# Altium PCB PCB1update.PcbDoc (part 2 of 2)
Units mil, origin at the board's own origin, x right, y up, seen from the top; angles counter-clockwise.
Board outline 3500 x 2300 mil, 2 copper layers (Top Layer, Bottom Layer); 42 components, 76 nets, 256 pads, 63 vias.
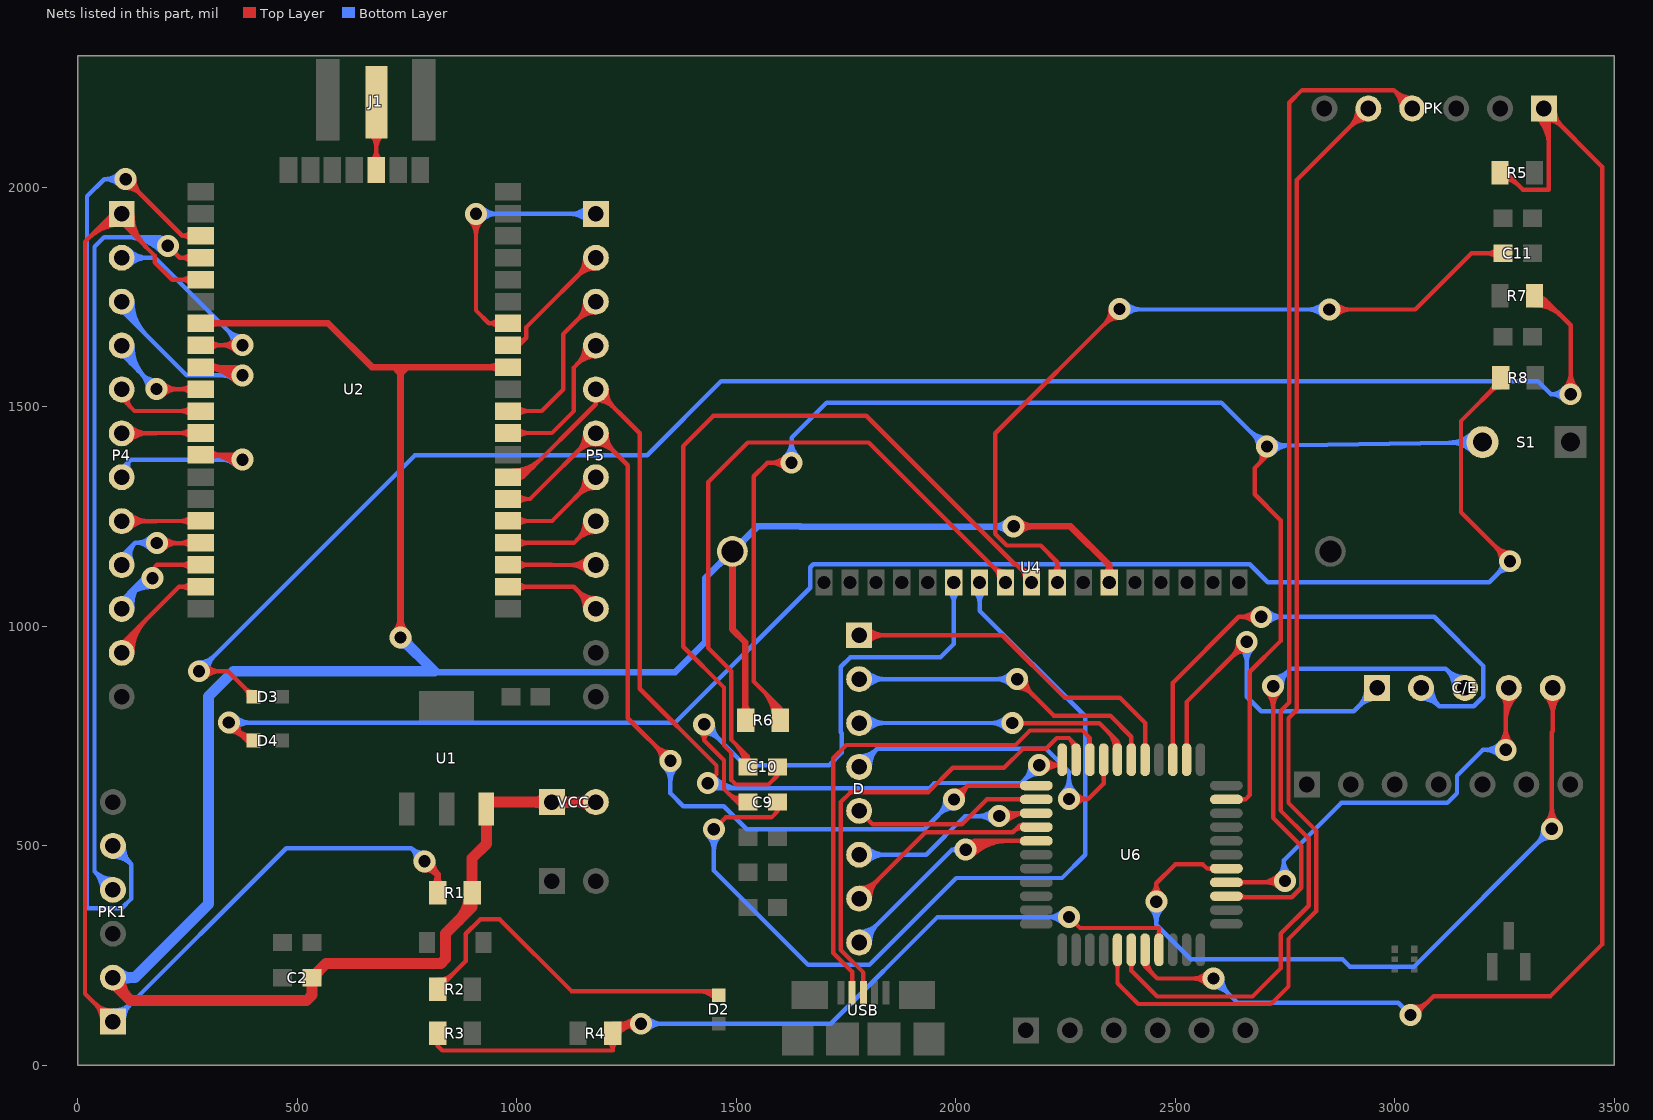
[diagram p2: the nets of this part, all layers, seen from the top]

## Via types
v1: diameter 50, hole 28, Top Layer to Bottom Layer, 63 vias

## Nets (pads, with @x,y where several pads share a name; then routed paths per layer and width w, separated by ;. In a path a pad name is that pad's centre, name@x,y a point inside that pad or via, vN(x,y) a via of type N, cw(c..) or ccw(c..) an arc to the next point about the centre after c; other vN are vias at no path point) (continued)
NetC9_1: C9.1 U4.6 | length 1508.3
  Top Layer w10: v1@1416.21,760.16 cw(c1403.58,740.44) 1427,740.44 ; v1(1427,777) 1427,740.44 ; v1@1437.79,760.16 ccw(c1450.42,740.44) 1427,740.44 ; 1483.28,618.72 ccw(c1504.5,639.93) C9.1@1517.97,613.12 ; 1493.07,608.93 ccw(c1511.05,626.9) C9.1@1522.46,604.19 ; 1502.86,599.14 ccw(c1517.6,613.87) C9.1@1526.95,595.25 ; C9.1@1511.14,594.05 ccw(c1502,590) 1502,600 ; C9.1@1511.14,605.95 cw(c1502,610) 1502,600 ; C9.1@1526.54,600 1502,600 ; 1427,740.44 1472,695.44 1472,630 1502,600
  Bottom Layer w10: v1@1427,757 cw(c1427,708.72) 1461.14,742.86 cw(c1495.28,777) v1@1447,777 ; v1(1427,777) 1520,684 1712,684 1740,712 1740,757 1738,759 1738,908 1760,930 1965.28,930 1995.28,960 U4.6@1995.28,1100 ; U4.6@1984.89,1079.3 cw(c1959.82,1054.23) 1995.28,1054.23 cw(c2030.73,1054.23) U4.6@2005.66,1079.3
NetC9_2: C9.2 U4.7 | length 2187.2
  Top Layer w10: v1(1449,538) 1476,565 1580,565 1593.46,578.46 ; C9.2@1588.1,586.33 cw(c1585.02,578.46) 1593.46,578.46 ; C9.2@1593.46,600 1593.46,578.46 ; C9.2@1598.83,586.33 ccw(c1601.91,578.46) 1593.46,578.46
  Bottom Layer w10: v1@1434.86,523.86 cw(c1400.72,489.72) 1449,489.72 cw(c1497.28,489.72) v1@1463.14,523.86 ; v1(1449,538) 1449,444 1664,229 1803,229 2001,427 2242,427 2295,480 2295,795.33 2054.33,1036 U4.7@2054.33,1100 ; U4.7@2043.95,1079.3 cw(c2018.88,1054.23) 2054.33,1054.23 cw(c2089.78,1054.23) U4.7@2064.71,1079.3
NetC10_1: C10.1 U4.9 | length 1998.9
  Top Layer w10: C10.1@1589.07,665.99 cw(c1587.19,660) 1593.46,660 ; C10.1@1593.46,680 1593.46,660 ; C10.1@1597.86,665.99 ccw(c1599.74,660) 1593.46,660 ; 2142.74,1137.3 ccw(c2172.44,1167) U4.9@2172.44,1125 ; 2149.29,1130.75 cw(c2128.85,1110.32) U4.9@2157.76,1110.32 ; U4.9@2172.44,1100 2172.44,1107.6 2138.04,1142 2134.26,1142 1796.26,1480 1448,1480 1379,1411 1379,954 1472,861 1472,729 1489,712 1489,650 1499,640 1573.46,640 1593.46,660
NetC10_2: C10.2 U4.8 | length 1717.7
  Top Layer w10: 1498.21,732.33 cw(c1445.88,680) C10.2@1519.88,680 ; 1515.28,715.26 cw(c1480.02,680) C10.2@1529.88,680 ; C10.2@1519.85,693.08 ccw(c1514.27,704) 1526.54,704 ; C10.2@1526.54,680 1526.54,704 ; C10.2@1533.22,693.08 cw(c1538.8,704) 1526.54,704 ; 2083.68,1137.3 ccw(c2113.39,1167.01) U4.8@2113.39,1125 ; 2090.24,1130.75 cw(c2069.8,1110.32) U4.8@2098.7,1110.32 ; U4.8@2113.39,1100 2113.39,1107.6 1801.99,1419 1526,1419 1436,1329 1436,951 1489,898 1489,741.54 1526.54,704
NetC11_2: C11.2 U4.10 | length 2207.4
  Top Layer w10: U4.10@2221.11,1120.7 ccw(c2196.04,1145.77) 2231.5,1145.77 ccw(c2266.95,1145.77) U4.10@2241.88,1120.7 ; U4.10@2231.5,1100 2231.5,1146.5 2193.53,1184.47 2116.34,1184.47 2090,1210.81 2090,1440 v1(2373,1723) ; v1@2353,1723 cw(c2304.72,1723) 2338.86,1688.86 cw(c2373,1654.72) v1@2373,1703 ; v1(2851,1722) 3047,1722 3175,1850 C11.2@3246.54,1850 ; v1@2865.14,1707.86 cw(c2899.28,1673.72) 2899.28,1722 cw(c2899.28,1770.28) v1@2865.14,1736.14 ; C11.2@3234.18,1839.62 ccw(c3209.11,1814.55) 3209.11,1850 ccw(c3209.11,1885.45) C11.2@3234.18,1860.38
  Bottom Layer w10: v1(2373,1723) 2374,1722 v1(2851,1722) ; v1@2380.07,1730.07 ccw(c2399.56,1749.56) 2399.56,1722 ; v1@2387.14,1708.86 cw(c2418.87,1677.13) 2418.87,1722 ; v1@2387.14,1737.14 ccw(c2423.7,1773.7) 2423.7,1722 ; v1@2836.86,1707.86 ccw(c2802.72,1673.72) 2802.72,1722 ccw(c2802.72,1770.28) v1@2836.86,1736.14
NetC/E_1: C/E.1 U6.35 | length 1104.7
  Top Layer w10: U6.35@2521.86,727.23 ccw(c2511.92,737.18) 2525.98,737.18 ccw(c2540.05,737.18) U6.35@2530.1,727.23 ; U6.35@2525.98,696.54 2525.98,827.98 v1(2663,965) ; v1@2643,965 cw(c2594.72,965) 2628.86,930.86 cw(c2663,896.72) v1@2663,945
  Bottom Layer w10: v1@2648.86,950.86 cw(c2614.72,916.72) 2663,916.72 cw(c2711.28,916.72) v1@2677.14,950.86 ; v1(2663,965) 2663,840 2696,807 2907,807 C/E.1@2960,860 ; C/E.1@2935.47,860 cw(c2876.26,860) 2918.13,818.13 cw(c2960,776.26) C/E.1@2960,835.47 ; C/E.1@2945.47,860 cw(c2910.4,860) 2935.2,835.2 cw(c2960,810.4) C/E.1@2960,845.47
NetC/E_2: C/E.2 U6.36 | length 1551.6
  Top Layer w10: U6.36@2490.37,727.23 ccw(c2480.42,737.18) 2494.49,737.18 ccw(c2508.55,737.18) U6.36@2498.61,727.23 ; U6.36@2494.49,696.54 2494.49,871.49 2645,1022 v1(2696,1022) ; v1@2681.86,1007.86 ccw(c2647.72,973.72) 2647.72,1022 ccw(c2647.72,1070.28) v1@2681.86,1036.14
  Bottom Layer w10: v1(2696,1022) 3090,1022 3202,910 3202,840 3180,818 3102,818 C/E.2@3060,860 ; v1@2710.14,1007.86 cw(c2744.28,973.72) 2744.28,1022 cw(c2744.28,1070.28) v1@2710.14,1036.14 ; C/E.2@3060,835.47 cw(c3060,776.26) 3101.87,818.13 cw(c3143.74,860) C/E.2@3084.53,860 ; C/E.2@3060,845.47 cw(c3060,810.4) 3084.8,835.2 cw(c3109.6,860) C/E.2@3074.53,860
NetC/E_3: C/E.3 U6.25 | length 1455.7
  Top Layer w10: U6.25@2616.54,385.51 2619.05,383 2765.33,383 2787,404.67 2787,500 2723,564 v1(2723,864) ; U6.25@2647.23,389.63 ccw(c2663.24,405.64) 2663.24,383 ; v1@2708.86,849.86 cw(c2674.72,815.72) 2723,815.72 cw(c2771.28,815.72) v1@2737.14,849.86
  Bottom Layer w10: v1(2723,864) 2763,904 3116,904 C/E.3@3160,860 ; v1@2723,884 ccw(c2723,932.28) 2757.14,898.14 ccw(c2791.28,864) v1@2743,864 ; C/E.3@3135.47,860 ccw(c3076.26,860) 3118.13,901.87 ccw(c3160,943.74) C/E.3@3160,884.53 ; C/E.3@3145.47,860 ccw(c3110.4,860) 3135.2,884.8 ccw(c3160,909.6) C/E.3@3160,874.53
NetC/E_4: C/E.4 U6.26 | length 1464
  Top Layer w10: U6.26@2616.54,417.01 2747.01,417.01 v1(2750,420) ; U6.26@2647.23,412.89 cw(c2657.18,402.94) 2657.18,417.01 cw(c2657.18,431.07) U6.26@2647.23,421.13 ; 2694.49,417.01 ccw(c2694.49,475.51) v1@2735.86,434.14 ; 2708.94,417.01 cw(c2708.94,378.94) v1@2735.86,405.86 ; 2718.63,417.01 ccw(c2718.63,451.37) v1@2742.93,427.07 ; v1@3238.86,733.14 ccw(c3204.72,767.28) 3253,767.28 ccw(c3301.28,767.28) v1@3267.14,733.14 ; C/E.4@3242.66,842.66 cw(c3217.68,817.68) 3253,817.68 ; v1(3253,719) 3253,853 C/E.4@3260,860 ; 3253,783.89 cw(c3336.11,783.89) C/E.4@3277.34,842.66 ; 3253,808.03 cw(c3311.97,808.03) C/E.4@3270.27,849.73
  Bottom Layer w10: v1@2735.86,434.14 ccw(c2708.96,461.04) 2747,461.04 ; 2747,446.56 ccw(c2770.64,446.56) v1@2756.14,427.9 ; v1(2750,420) 2747,423 2747,467 ; v1@2762.27,435.79 cw(c2786.52,467) 2747,467 ; v1@3238.86,704.86 ccw(c3204.72,670.72) 3204.72,719 ccw(c3204.72,767.28) v1@3238.86,733.14 ; v1(3253,719) 3201,719 3142,660 3142,620 3120,598 2878,598 2747,467
NetC/E_5: C/E.5 U6.27 | length 2126.6
  Top Layer w10: v1@2444.39,388.53 ccw(c2422.9,415) 2457,415 ; v1(2457,373) 2457,415 ; v1@2469.61,388.53 cw(c2491.1,415) 2457,415 ; U6.27@2585.84,444.38 ccw(c2575.89,434.44) 2575.89,448.5 ccw(c2575.89,462.57) U6.27@2585.84,452.62 ; U6.27@2616.54,448.5 2572.5,448.5 2563,458 2500,458 2457,415 ; C/E.5@3342.66,842.66 cw(c3300.79,800.79) 3360,800.79 cw(c3419.21,800.79) C/E.5@3377.34,842.66 ; v1@3343.86,553.14 ccw(c3309.72,587.28) 3358,587.28 ccw(c3406.28,587.28) v1@3372.14,553.14 ; C/E.5@3349.73,849.73 cw(c3324.93,824.93) 3360,824.93 cw(c3395.07,824.93) C/E.5@3370.27,849.73 ; v1(3358,539) 3358,759 3360,761 C/E.5@3360,860
  Bottom Layer w10: v1@2442.86,358.86 cw(c2408.72,324.72) 2457,324.72 cw(c2505.28,324.72) v1@2471.14,358.86 ; v1(2457,373) 2457,320.51 2535.51,242 2881,242 2898,225 3044,225 v1(3358,539) ; v1@3338,539 cw(c3289.72,539) 3323.86,504.86 cw(c3358,470.72) v1@3358,519
NetD2_1: D2.1 R2.1 | length 963.5
  Top Layer w10: R2.1@819.69,173.43 884,237.74 884,300 916.68,332.68 961.32,332.68 1124.71,169.29 1450.71,169.29 D2.1@1460,160 ; R2.1@819.69,185 ccw(c819.69,212.94) 839.45,193.19 ; R2.1@819.69,195 ccw(c819.69,247.09) 856.52,210.26 ; R2.1@834.37,180.32 cw(c853.19,180.32) 839.88,193.62 ; 1411.62,169.29 cw(c1411.62,111.62) D2.1@1452.4,152.4 ; 1435.76,169.29 cw(c1435.76,135.76) D2.1@1459.47,159.47
NetD3_1: D3.1 R7.2 | length 4388.5
  Top Layer w10: v1(276,898) 342,898 D3.1@400,840 ; v1@290.14,883.86 cw(c324.28,849.72) 324.28,898 cw(c324.28,946.28) v1@290.14,912.14 ; D3.1@389.25,840 ccw(c363.3,840) 381.65,858.35 ccw(c400,876.7) D3.1@400,850.75 ; R7.2@3318.43,1731.85 cw(c3318.43,1643.19) 3381.12,1705.88 ; R7.2@3318.43,1741.85 cw(c3318.43,1677.34) 3364.04,1722.96 ; R7.2@3318.43,1751.85 cw(c3318.43,1711.48) 3346.97,1740.03 ; R7.2@3318.43,1753.43 3318.43,1747 3340,1747 ; R7.2@3321.71,1743.2 cw(c3332.76,1731.98) 3343.89,1743.11 ; R7.2@3328.73,1736.07 cw(c3339.83,1724.79) 3351.02,1735.98 ; R7.2@3331.92,1752.32 ccw(c3340,1755.79) 3340,1747 ; R7.2@3332.24,1741.55 cw(c3340,1738.75) 3340,1747 ; v1@3386.86,1543.14 ccw(c3352.72,1577.28) 3401,1577.28 ccw(c3449.28,1577.28) v1@3415.14,1543.14 ; v1(3401,1529) 3401,1686 3340,1747
  Bottom Layer w10: v1(276,898) 768,1390 1297,1390 1466,1559 3326,1559 3356,1529 ; v1@276,918 ccw(c276,966.28) 310.14,932.14 ccw(c344.28,898) v1@296,898 ; v1@3386.15,1515.6 ccw(c3356,1488.38) 3356,1529 ; v1@3386.15,1542.4 cw(c3356,1569.62) 3356,1529 ; v1(3401,1529) 3356,1529
NetD4_1: D4.1 R8.2 | length 4125.9
  Top Layer w10: v1@344,761 cw(c344,712.72) 378.14,746.86 cw(c412.28,781) v1@364,781 ; v1(344,781) 385,740 D4.1@400,740 ; v1@356.05,768.95 ccw(c400,812.91) D4.1@400,750.75 ; 373.12,751.88 ccw(c400,778.77) D4.1@400,740.75 ; 3215.72,1532.72 ccw(c3188.76,1559.68) R8.2@3226.89,1559.68 ; 3218.4,1535.4 cw(c3241.57,1512.23) R8.2@3241.57,1545 ; R8.2@3241.57,1566.57 3241.57,1558.57 3151,1468 3151,1260.42 v1(3262.8,1148.62) ; v1@3242.8,1148.62 ccw(c3194.51,1148.62) 3228.65,1182.76 ccw(c3262.8,1216.91) v1@3262.8,1168.62
  Bottom Layer w10: v1(344,781) 1361,781 1668.31,1088.31 1668.31,1134.97 1675.34,1142 2669.54,1142 2710.54,1101 3215.17,1101 v1(3262.8,1148.62) ; v1@358.14,766.86 cw(c392.28,732.72) 392.28,781 cw(c392.28,829.28) v1@358.14,795.14 ; v1@3246.69,1150.64 cw(c3203.36,1150.64) 3234,1120 cw(c3254.57,1099.43) v1@3254.57,1128.52
NetD_1: D.1 U6.38 | length 988
  Top Layer w10: D.1@1780,980 2106,980 2248,838 2373.5,838 2431.5,780 U6.38@2431.5,696.54 ; D.1@1790.27,969.73 cw(c1815.07,944.93) 1815.07,980 cw(c1815.07,1015.07) D.1@1790.27,990.27 ; D.1@1797.34,962.66 cw(c1839.21,920.79) 1839.21,980 cw(c1839.21,1039.21) D.1@1797.34,997.34 ; U6.38@2427.38,727.23 ccw(c2417.43,737.18) 2431.5,737.18 ccw(c2445.56,737.18) U6.38@2435.62,727.23
NetD_2: D.2 U6.39 | length 1048.6
  Top Layer w10: v1@2140,860 cw(c2140,811.72) 2174.14,845.86 cw(c2208.28,880) v1@2160,880 ; v1(2140,880) 2223.06,796.94 2352.06,796.94 2400,749 U6.39@2400,696.54 ; U6.39@2395.88,727.23 ccw(c2385.93,737.18) 2400,737.18 ccw(c2414.07,737.18) U6.39@2404.12,727.23
  Bottom Layer w10: D.2@1780,880 v1(2140,880) ; D.2@1790.27,869.73 cw(c1815.07,844.93) 1815.07,880 cw(c1815.07,915.07) D.2@1790.27,890.27 ; D.2@1797.34,862.66 cw(c1839.21,820.79) 1839.21,880 cw(c1839.21,939.21) D.2@1797.34,897.34 ; v1@2125.86,865.86 ccw(c2091.72,831.72) 2091.72,880 ccw(c2091.72,928.28) v1@2125.86,894.14
NetD_3: D.3 U6.40 | length 955.2
  Top Layer w10: v1(2129,780) 2129.06,779.94 2327.06,779.94 2368.5,738.5 U6.40@2368.5,696.54 ; 2347.68,759.32 cw(c2311.47,723.11) U6.40@2362.68,723.11 ; U6.40@2364.38,727.23 ccw(c2354.44,737.18) 2368.5,737.18 ccw(c2382.57,737.18) U6.40@2372.62,727.23 ; 2364.75,742.25 cw(c2345.61,723.11) U6.40@2372.68,723.11
  Bottom Layer w10: D.3@1780,780 v1(2129,780) ; D.3@1790.27,769.73 cw(c1815.07,744.93) 1815.07,780 cw(c1815.07,815.07) D.3@1790.27,790.27 ; D.3@1797.34,762.66 cw(c1839.21,720.79) 1839.21,780 cw(c1839.21,839.21) D.3@1797.34,797.34 ; v1@2114.86,765.86 ccw(c2080.72,731.72) 2080.72,780 ccw(c2080.72,828.28) v1@2114.86,794.14
NetD_4: D.4 U6.41 | length 1033.4
  Top Layer w10: v1(2258,607.01) 2302,607.01 ; v1@2273.07,593.86 cw(c2302,568.61) 2302,607.01 ; v1@2273.07,620.16 ccw(c2302,645.4) 2302,607.01 ; U6.41@2332.89,665.84 cw(c2322.94,655.89) 2337.01,655.89 cw(c2351.07,655.89) U6.41@2341.13,665.84 ; U6.41@2337.01,696.54 2337.01,642.02 2302,607.01
  Bottom Layer w10: D.4@1780,680 1821,721 ; D.4@1780.22,694.53 ccw(c1780.72,727.85) 1804.28,704.28 ccw(c1827.85,680.72) D.4@1794.53,680.22 ; D.4@1780.37,704.52 ccw(c1781.21,760.78) 1821,721 ; D.4@1804.52,680.37 cw(c1860.78,681.21) 1821,721 ; v1@2243.86,621.15 ccw(c2209.72,655.29) 2258,655.29 ccw(c2306.28,655.29) v1@2272.14,621.15 ; v1(2258,607.01) 2258,669 2206,721 1821,721
NetD_5: D.5 U6.2 | length 462
  Top Layer w10: D.5@1780,580 1811,549 2013.44,549 2070.42,605.98 U6.2@2183.46,605.98 ; U6.2@2152.77,601.86 ccw(c2142.82,591.92) 2142.82,605.98 ccw(c2142.82,620.05) U6.2@2152.77,610.1
NetD_6: D.6 U6.3 | length 800.9
  Top Layer w10: v1(2099,568) 2105.49,574.49 U6.3@2183.46,574.49 ; v1@2106.07,560.93 cw(c2138.81,528.19) 2138.81,574.49 ; v1@2113.14,553.86 cw(c2162.95,504.05) U6.3@2162.95,574.49 ; v1@2113.14,582.14 ccw(c2131.62,600.62) 2131.62,574.49 ; U6.3@2152.77,570.37 ccw(c2142.82,560.42) 2142.82,574.49 ccw(c2142.82,588.55) U6.3@2152.77,578.61
  Bottom Layer w10: D.6@1780,480 1933,480 2021,568 v1(2099,568) ; D.6@1790.27,469.73 cw(c1815.07,444.93) 1815.07,480 cw(c1815.07,515.07) D.6@1790.27,490.27 ; D.6@1797.34,462.66 cw(c1839.21,420.79) 1839.21,480 cw(c1839.21,539.21) D.6@1797.34,497.34 ; v1@2084.86,553.86 ccw(c2050.72,519.72) 2050.72,568 ccw(c2050.72,616.28) v1@2084.86,582.14
NetD_7: D.7 U6.4 | length 698.8
  Top Layer w10: D.7@1780,380 1931,531 2130.01,531 2142,542.99 U6.4@2183.46,542.99 ; D.7@1780,394.53 ccw(c1780,429.6) 1804.8,404.8 ccw(c1829.6,380) D.7@1794.53,380 ; D.7@1780,404.53 ccw(c1780,463.74) 1821.87,421.87 ccw(c1863.74,380) D.7@1804.53,380 ; 2134.56,535.55 cw(c2145.8,524.3) U6.4@2153.92,537.98 ; 2139,539.99 cw(c2156.34,522.66) U6.4@2157,547.16 ; 2143.66,544.65 cw(c2152.58,535.73) U6.4@2159.02,546.58 ; U6.4@2152.77,538.87 ccw(c2142.82,528.93) 2142.82,542.99 ccw(c2142.82,557.06) U6.4@2152.77,547.11
NetD_8: D.8 U6.5 | length 954.2
  Top Layer w10: v1@2015.43,498.57 cw(c2046.65,467.35) 2046.65,511.5 ; v1@2029.58,484.42 cw(c2094.93,419.07) 2094.93,511.5 ; v1@2036.65,477.35 cw(c2119.07,394.93) 2119.07,511.5 ; 2070.79,511.5 ccw(c2070.79,443.21) v1(2022.5,491.5) 2042.5,511.5 U6.5@2183.46,511.5 ; U6.5@2152.77,507.38 ccw(c2142.82,497.43) 2142.82,511.5 ccw(c2142.82,525.56) U6.5@2152.77,515.62
  Bottom Layer w10: D.8@1780,280 1991.5,491.5 ; D.8@1780,294.53 ccw(c1780,329.6) 1804.8,304.8 ccw(c1829.6,280) D.8@1794.53,280 ; D.8@1780,304.53 ccw(c1780,363.74) 1821.87,321.87 ccw(c1863.74,280) D.8@1804.53,280 ; v1@2004.28,483.25 ccw(c1991.5,477.46) 1991.5,491.5 ; v1@2004.28,499.74 cw(c1991.5,505.53) 1991.5,491.5 ; v1(2022.5,491.5) 1991.5,491.5
NetJ1_1: J1.1 U2.23 | length 307
  Top Layer w10: J1.1@666.58,2122.28 cw(c634.18,2089.87) 680,2089.87 ; U2.23@669.39,2060.61 ccw(c643.79,2086.21) 680,2086.21 ccw(c716.21,2086.21) U2.23@690.61,2060.61 ; U2.23@680,2040 J1.1@680,2193.37 ; 680,2086.39 cw(c730.74,2086.39) J1.1@694.86,2122.28 ; 680,2110.54 cw(c706.6,2110.54) J1.1@687.79,2129.35
NetP4_1: P4.1 PK1.1 R1.1 U2.32 | length 4053
  Top Layer w10: 23.99,1883.99 cw(c100,1807.97) P4.1@100,1915.47 ; 41.06,1901.06 cw(c100,1842.12) P4.1@100,1925.47 ; PK1.1@55.47,100 ccw(c-3.74,100) 38.13,141.87 ccw(c80,183.74) PK1.1@80,124.53 ; 58.13,1918.13 cw(c100,1876.26) P4.1@100,1935.47 ; PK1.1@65.47,100 ccw(c30.4,100) 55.2,124.8 ccw(c80,149.6) PK1.1@80,114.53 ; PK1.1@80,100 16.47,163.53 16.47,1876.47 80,1940 174.88,1845.12 174.88,1830 214.88,1790 U2.32@280,1790 ; P4.1@104.53,1940 ccw(c163.74,1940) 121.87,1898.13 ; P4.1@114.53,1940 ccw(c197.88,1940) 138.94,1881.06 ; P4.1@124.53,1940 ccw(c232.03,1940) 156.01,1863.99 ; U2.32@259.39,1779.39 ccw(c233.79,1753.79) 233.79,1790 ccw(c233.79,1826.21) U2.32@259.39,1800.61
  Top Layer w15: v1(790,465) 819.69,435.31 ; v1@790.08,447.5 cw(c790.27,405.9) 819.68,435.32 ; v1@807.5,464.92 ccw(c849.1,464.73) 819.68,435.32 ; R1.1@811.07,408.93 ccw(c790.27,429.73) 819.69,429.73 ccw(c849.1,429.73) R1.1@828.3,408.93 ; R1.1@819.69,393.43 819.69,435.31
  Bottom Layer w10: PK1.1@80,100 475,495 760,495 ; PK1.1@80,114.53 ccw(c80,149.6) 104.8,124.8 ccw(c129.6,100) PK1.1@94.53,100 ; PK1.1@80,124.53 ccw(c80,183.74) 121.87,141.87 ccw(c163.74,100) PK1.1@104.53,100 ; v1@770.09,466.91 ccw(c735.26,470.25) 760,495 ; v1@788.09,484.91 cw(c784.75,519.74) 760,495 ; v1(790,465) 760,495
NetP4_2: P4.2 U2.35 | length 829.2
  Top Layer w10: U2.35@280,1640.79 v1(375,1640.79) ; U2.35@300.61,1630.18 cw(c326.21,1604.57) 326.21,1640.79 cw(c326.21,1677) U2.35@300.61,1651.39 ; v1@360.86,1626.65 ccw(c326.72,1592.5) 326.72,1640.79 ccw(c326.72,1689.07) v1@360.86,1654.93
  Bottom Layer w10: P4.2@80,1840 175.79,1840 v1(375,1640.79) ; P4.2@110.27,1829.73 cw(c135.07,1804.93) 135.07,1840 cw(c135.07,1875.07) P4.2@110.27,1850.27 ; P4.2@117.34,1822.66 cw(c159.21,1780.79) 159.21,1840 cw(c159.21,1899.21) P4.2@117.34,1857.34 ; v1@355,1640.79 ccw(c306.72,1640.79) 340.86,1674.93 ccw(c375,1709.07) v1@375,1660.79
NetP4_3: P4.3 U2.36 | length 1035.9
  Top Layer w10: U2.36@280,1590.79 356.21,1590.79 v1(375,1572) ccw(c329.64,1526.64) 329.64,1590.79 ; U2.36@281.36,1590.79 cw(c281.36,1478.36) v1@360.86,1557.86 ; U2.36@300.61,1580.18 cw(c326.21,1554.57) 326.21,1590.79 cw(c326.21,1627) U2.36@300.61,1601.39 ; U2.36@305.5,1590.79 cw(c305.5,1502.5) v1@367.93,1564.93 ; 353.78,1590.79 cw(c353.78,1550.78) v1@382.07,1579.07
  Bottom Layer w10: P4.3@80,1740 248,1572 v1(375,1572) ; P4.3@104.53,1740 ccw(c163.74,1740) 121.87,1698.13 ; P4.3@114.53,1740 ccw(c197.88,1740) 138.94,1681.06 ; P4.3@124.53,1740 ccw(c232.03,1740) 156.01,1663.99 ; v1@360.86,1557.86 ccw(c326.72,1523.72) 326.72,1572 ccw(c326.72,1620.28) v1@360.86,1586.14
NetP4_4: P4.4 U2.37 | length 646.1
  Top Layer w10: v1(179.21,1540.79) U2.37@280,1540.79 ; v1@193.35,1526.65 cw(c227.5,1492.5) 227.5,1540.79 cw(c227.5,1589.07) v1@193.35,1554.93 ; U2.37@259.39,1530.18 ccw(c233.79,1504.57) 233.79,1540.79 ccw(c233.79,1577) U2.37@259.39,1551.39
  Bottom Layer w10: P4.4@80,1640 v1(179.21,1540.79) ; P4.4@104.53,1640 ccw(c163.74,1640) 121.87,1598.13 ; P4.4@114.53,1640 ccw(c197.88,1640) 138.94,1581.06 ; P4.4@124.53,1640 ccw(c232.03,1640) 156.01,1563.99 ; v1@159.21,1540.79 ccw(c110.93,1540.79) 145.07,1574.93 ccw(c179.21,1609.07) v1@179.21,1560.79
NetP4_5: P4.5 U2.38 | length 327
  Top Layer w10: P4.5@80,1540 129.21,1490.79 U2.38@280,1490.79 ; P4.5@110.93,1530.43 ccw(c123.09,1519.77) 111.66,1508.34 ; P4.5@118.45,1523.84 ccw(c131.14,1512.72) 119.21,1500.79 ; U2.38@259.39,1480.18 ccw(c233.79,1454.57) 233.79,1490.79 ccw(c233.79,1527) U2.38@259.39,1501.39
NetP4_6: P4.6 U2.39 | length 405.3
  Top Layer w10: P4.6@80,1440 179,1440 179.79,1440.79 U2.39@280,1440.79 ; P4.6@110.27,1429.73 cw(c135.07,1404.93) 135.07,1440 cw(c135.07,1475.07) P4.6@110.27,1450.27 ; P4.6@117.34,1422.66 cw(c159.21,1380.79) 159.21,1440 cw(c159.21,1499.21) P4.6@117.34,1457.34 ; U2.39@259.39,1430.18 ccw(c233.79,1404.57) 233.79,1440.79 ccw(c233.79,1477) U2.39@259.39,1451.39
NetP4_7: P4.7 U2.40 | length 739.4
  Top Layer w10: U2.40@280,1390.79 364.21,1390.79 v1(375,1380) ccw(c348.96,1353.96) 348.96,1390.79 ; U2.40@300.61,1380.18 cw(c326.21,1354.57) 326.21,1390.79 cw(c326.21,1427) U2.40@300.61,1401.39 ; U2.40@300.67,1390.79 cw(c300.67,1305.67) v1@360.86,1365.86 ; 324.81,1390.79 cw(c324.81,1329.81) v1@367.93,1372.93
  Bottom Layer w10: P4.7@80,1340 120,1380 ; P4.7@111.18,1349.28 cw(c124.31,1360.18) 112.24,1372.24 ; P4.7@118.87,1355.67 cw(c132.78,1367.21) 120,1380 ; v1@360.86,1365.86 ccw(c326.72,1331.72) 326.72,1380 ccw(c326.72,1428.28) v1@360.86,1394.14 ; v1(375,1380) 120,1380
NetP4_8: P4.8 U2.43 | length 405.2
  Top Layer w10: P4.8@80,1240 179,1240 179.39,1240.39 U2.43@280,1240.39 ; P4.8@110.27,1229.73 cw(c135.07,1204.93) 135.07,1240 cw(c135.07,1275.07) P4.8@110.27,1250.27 ; P4.8@117.34,1222.66 cw(c159.21,1180.79) 159.21,1240 cw(c159.21,1299.21) P4.8@117.34,1257.34 ; U2.43@259.39,1229.79 ccw(c233.79,1204.18) 233.79,1240.39 ccw(c233.79,1276.61) U2.43@259.39,1251
NetP4_9: P4.9 U2.44 | length 561.9
  Top Layer w10: v1(180,1190) 279.61,1190 U2.44@280,1190.39 ; v1@194.14,1175.86 cw(c228.28,1141.72) 228.28,1190 cw(c228.28,1238.28) v1@194.14,1204.14 ; 232.84,1190 ccw(c232.84,1227.56) U2.44@259.39,1201 ; 234.74,1190 cw(c234.74,1155.13) U2.44@259.39,1179.79
  Bottom Layer w10: P4.9@80,1140 131,1191 ; P4.9@104.19,1141.73 cw(c128.03,1151.56) 109.79,1169.79 ; P4.9@113.43,1145.54 cw(c143.05,1157.74) 120.4,1180.4 ; P4.9@122.68,1149.35 cw(c158.06,1163.93) 131,1191 ; 134.13,1191 ccw(c134.13,1235.87) v1@165.86,1204.14 ; 154.33,1191 cw(c154.33,1165.56) v1@172.76,1183.1 ; v1@165.52,1176.21 ccw(c131,1143.34) 131,1191 ; v1(180,1190) 179,1191 131,1191
NetP4_10: P4.10 U2.45 | length 657.4
  Top Layer w10: v1(170,1110) 170,1130 180.39,1140.39 U2.45@280,1140.39 ; U2.45@259.39,1129.79 ccw(c233.79,1104.18) 233.79,1140.39 ccw(c233.79,1176.61) U2.45@259.39,1151
  Bottom Layer w10: P4.10@80,1040 v1@150,1110 ; P4.10@101.72,1061.72 cw(c170,993.43) v1@170,1090 ; P4.10@104.52,1040.32 cw(c154.15,1043.79) 118.97,1078.97 ; P4.10@114.49,1041.01 cw(c183.15,1045.82) 134.48,1094.48 ; 118.79,1078.79 cw(c170,1027.57) v1@170,1100 ; P4.10@124.47,1041.71 cw(c212.15,1047.85) v1@150,1110 ; 135.86,1095.86 cw(c170,1061.72) v1(170,1110) v1@150,1110
NetP4_11: P4.11 U2.46 | length 515.6
  Top Layer w10: P4.11@80,940 230.39,1090.39 U2.46@280,1090.39 ; P4.11@104.53,940 cw(c163.74,940) 121.87,981.87 ; P4.11@114.53,940 cw(c197.88,940) 138.94,998.94 ; P4.11@124.53,940 cw(c232.03,940) 156.01,1016.01 ; U2.46@259.39,1079.79 ccw(c233.79,1054.18) 233.79,1090.39 ccw(c233.79,1126.61) U2.46@259.39,1101
NetP5_1: P5.1 U2.14 | length 929
  Top Layer w10: v1@892.86,1925.86 cw(c858.72,1891.72) 907,1891.72 cw(c955.28,1891.72) v1@921.14,1925.86 ; v1(907,1940) 907,1720 936.21,1690.79 ; U2.14@958.87,1680.73 ccw(c936.21,1660.24) 936.21,1690.79 ; U2.14@958.87,1700.85 cw(c936.21,1721.34) 936.21,1690.79 ; U2.14@980,1690.79 936.21,1690.79
  Bottom Layer w10: v1(907,1940) P5.1@1180,1940 ; v1@921.14,1925.86 cw(c955.28,1891.72) 955.28,1940 cw(c955.28,1988.28) v1@921.14,1954.14 ; P5.1@1162.66,1922.66 ccw(c1120.79,1880.79) 1120.79,1940 ccw(c1120.79,1999.21) P5.1@1162.66,1957.34 ; P5.1@1169.73,1929.73 ccw(c1144.93,1904.93) 1144.93,1940 ccw(c1144.93,1975.07) P5.1@1169.73,1950.27
NetP5_2: P5.2 U2.13 | length 493.5
  Top Layer w10: U2.13@980,1640.79 1004.79,1640.79 1022,1658 ; U2.13@992.3,1645.23 ccw(c1000.19,1660.47) 1012.33,1648.33 ; U2.13@996.9,1654.11 ccw(c1006.79,1673.21) 1022,1658 ; P5.2@1155.47,1840 cw(c1096.26,1840) 1138.13,1798.13 cw(c1180,1756.26) P5.2@1180,1815.47 ; P5.2@1165.47,1840 cw(c1130.4,1840) 1155.2,1815.2 cw(c1180,1790.4) P5.2@1180,1825.47 ; P5.2@1180,1840 1022,1682 1022,1658
NetP5_3: P5.3 U2.10 | length 582
  Top Layer w10: U2.10@980,1490.79 1056.79,1490.79 1106,1540 1106,1666 P5.3@1180,1740 ; U2.10@1000.61,1480.18 cw(c1026.21,1454.57) 1026.21,1490.79 cw(c1026.21,1527) U2.10@1000.61,1501.39 ; P5.3@1155.47,1740 cw(c1096.26,1740) 1138.13,1698.13 cw(c1180,1656.26) P5.3@1180,1715.47 ; P5.3@1165.47,1740 cw(c1130.4,1740) 1155.2,1715.2 cw(c1180,1690.4) P5.3@1180,1725.47
NetP5_4: P5.4 U2.9 | length 545.6
  Top Layer w10: U2.9@980,1440.79 1080,1440.79 1130.07,1490.86 1130.07,1590.07 P5.4@1180,1640 ; U2.9@1000.61,1430.18 cw(c1026.21,1404.57) 1026.21,1440.79 cw(c1026.21,1477) U2.9@1000.61,1451.39 ; P5.4@1155.47,1640 cw(c1096.26,1640) 1138.13,1598.13 cw(c1180,1556.26) P5.4@1180,1615.47 ; P5.4@1165.47,1640 cw(c1130.4,1640) 1155.2,1615.2 cw(c1180,1590.4) P5.4@1180,1625.47
NetP5_5: P5.5 U2.7 U6.44 | length 2844.6
  Top Layer w10: U2.7@980,1340.39 1014.39,1340.39 ; U2.7@990,1335.39 ccw(c990,1382.22) 1023.11,1349.11 ; U2.7@990,1345.39 ccw(c990,1416.36) 1040.18,1366.18 ; U2.7@990,1355.39 ccw(c990,1450.5) 1057.25,1383.25 ; U2.7@1003.39,1333.63 cw(c1014.39,1328.06) 1014.39,1340.39 ; U2.7@1003.39,1347.16 ccw(c1014.39,1352.73) 1014.39,1340.39 ; P5.5@1172.26,1516.72 cw(c1168.7,1506) 1180,1506 ; P5.5@1180,1515.47 cw(c1180,1456.26) 1221.87,1498.13 cw(c1263.74,1540) P5.5@1204.53,1540 ; P5.5@1180,1525.47 cw(c1180,1490.4) 1204.8,1515.2 cw(c1229.6,1540) P5.5@1194.53,1540 ; P5.5@1187.74,1516.72 ccw(c1191.3,1506) 1180,1506 ; v1(1435,643) 1455,663 1455,683 1280,858 1280,1440 P5.5@1180,1540 1180,1506 ; v1(2190,684) 2242.52,684 U6.44@2242.52,696.54 ; v1@2204.14,669.86 cw(c2238.28,635.72) 2238.28,684 cw(c2238.28,732.28) v1@2204.14,698.14 ; 1014.39,1340.39 1180,1506
  Bottom Layer w10: v1@1442.07,650.07 ccw(c1488.11,696.11) 1488.11,631 ; v1@1449.14,657.14 ccw(c1512.25,720.25) 1512.25,631 ; 1463.97,631 cw(c1463.97,671.97) v1(1435,643) 1447,631 1939,631 1951.46,643.46 2149.46,643.46 v1(2190,684) ; v1@2170,684 cw(c2121.72,684) 2155.86,649.86 cw(c2190,615.72) v1@2190,664
NetP5_6: P5.6 U2.6 U6.1 | length 2837.8
  Top Layer w10: P5.6@1155.47,1440 cw(c1096.26,1440) 1138.13,1398.13 cw(c1180,1356.26) 1180,1415.47 cw(c1180,1356.26) 1221.87,1398.13 cw(c1263.74,1440) P5.6@1204.53,1440 ; P5.6@1165.47,1440 cw(c1130.4,1440) 1155.2,1415.2 cw(c1180,1390.4) 1180,1425.47 cw(c1180,1390.4) 1204.8,1415.2 cw(c1229.6,1440) P5.6@1194.53,1440 ; v1@1330,694 ccw(c1281.72,694) 1315.86,728.14 ccw(c1350,762.28) v1@1350,714 ; v1(1350,694) 1253,791 1253,1367 P5.6@1180,1440 1030.39,1290.39 ; v1(1996,606) 2027.48,637.48 ; v1@1997.18,625.97 ccw(c1999.52,665.44) 2027.48,637.48 ; v1@2015.97,607.18 cw(c2055.44,609.52) 2027.48,637.48 ; U6.1@2152.77,633.36 ccw(c2142.82,623.41) 2142.82,637.48 ccw(c2142.82,651.55) U6.1@2152.77,641.6 ; U6.1@2183.46,637.48 2027.48,637.48 ; 1026.21,1290.39 ccw(c1026.21,1254.18) 1000.61,1279.79 cw(c1026.21,1254.18) 1026.21,1290.39 ; 1026.21,1290.39 cw(c1026.21,1326.61) 1000.61,1301 ccw(c1026.21,1326.61) 1026.21,1290.39 ; 1030.39,1290.39 U2.6@980,1290.39 1030.39,1290.39
  Bottom Layer w10: v1@1335.86,679.86 cw(c1301.72,645.72) 1350,645.72 cw(c1398.28,645.72) v1@1364.14,679.86 ; v1(1350,694) 1350,620 1379.45,590.55 1471.45,590.55 1524,538 1928,538 v1(1996,606) ; v1@1976,606 cw(c1927.72,606) 1961.86,571.86 cw(c1996,537.72) v1@1996,586
NetP5_7: P5.7 U2.5 | length 446.2
  Top Layer w10: U2.5@980,1240.39 1080.39,1240.39 P5.7@1180,1340 ; U2.5@1000.61,1229.79 cw(c1026.21,1204.18) 1026.21,1240.39 cw(c1026.21,1276.61) U2.5@1000.61,1251 ; P5.7@1155.47,1340 cw(c1096.26,1340) 1138.13,1298.13 cw(c1180,1256.26) P5.7@1180,1315.47 ; P5.7@1165.47,1340 cw(c1130.4,1340) 1155.2,1315.2 cw(c1180,1290.4) P5.7@1180,1325.47
NetP5_8: P5.8 U2.4 | length 425.5
  Top Layer w10: U2.4@980,1190.39 1130.39,1190.39 P5.8@1180,1240 ; U2.4@1000.61,1179.79 cw(c1026.21,1154.18) 1026.21,1190.39 cw(c1026.21,1226.61) U2.4@1000.61,1201 ; P5.8@1155.47,1240 cw(c1096.26,1240) 1138.13,1198.13 cw(c1180,1156.26) P5.8@1180,1215.47 ; P5.8@1165.47,1240 cw(c1130.4,1240) 1155.2,1215.2 cw(c1180,1190.4) P5.8@1180,1225.47
NetP5_9: P5.9 U2.3 | length 405.2
  Top Layer w10: U2.3@980,1140.39 1079,1140.39 1079.39,1140 P5.9@1180,1140 ; U2.3@1000.61,1129.79 cw(c1026.21,1104.18) 1026.21,1140.39 cw(c1026.21,1176.61) U2.3@1000.61,1151 ; P5.9@1162.66,1122.66 ccw(c1120.79,1080.79) 1120.79,1140 ccw(c1120.79,1199.21) P5.9@1162.66,1157.34 ; P5.9@1169.73,1129.73 ccw(c1144.93,1104.93) 1144.93,1140 ccw(c1144.93,1175.07) P5.9@1169.73,1150.27
NetP5_10: P5.10 U2.2 | length 425.9
  Top Layer w10: U2.2@980,1090.39 1129.61,1090.39 P5.10@1180,1040 ; U2.2@1000.61,1079.79 cw(c1026.21,1054.18) 1026.21,1090.39 cw(c1026.21,1126.61) U2.2@1000.61,1101 ; P5.10@1155.47,1040 ccw(c1096.26,1040) 1138.13,1081.87 ccw(c1180,1123.74) P5.10@1180,1064.53 ; P5.10@1165.47,1040 ccw(c1130.4,1040) 1155.2,1064.8 ccw(c1180,1089.6) P5.10@1180,1054.53
NetPK1_4: PK1.4 U2.31 | length 2210.4
  Top Layer w10: v1(205,1867) 232,1840 U2.31@280,1840 ; U2.31@259.39,1829.39 ccw(c233.79,1803.79) 233.79,1840 ccw(c233.79,1876.21) U2.31@259.39,1850.61
  Bottom Layer w10: PK1.4@55.47,400 ccw(c-3.74,400) 38.13,441.87 ccw(c80,483.74) PK1.4@80,424.53 ; PK1.4@65.47,400 ccw(c30.4,400) 55.2,424.8 ccw(c80,449.6) PK1.4@80,414.53 ; PK1.4@80,400 38,442 38,1865 60,1887 185,1887 v1(205,1867) ccw(c156.72,1818.72) 156.72,1887 ; 108.43,1887 cw(c108.43,1770.43) v1@190.86,1852.86 ; 132.57,1887 cw(c132.57,1794.57) v1@197.93,1859.93 ; 180.86,1887 cw(c180.86,1842.86) v1@212.07,1874.07
NetPK1_5: PK1.5 U2.30 | length 2544
  Top Layer w10: v1@109,1999 cw(c109,1950.72) 143.14,1984.86 cw(c177.28,2019) v1@129,2019 ; v1(109,2019) 238,1890 ; U2.30@258.47,1880.4 ccw(c238,1863.37) 238,1890 ; U2.30@258.47,1899.6 cw(c238,1916.63) 238,1890 ; U2.30@280,1890 238,1890
  Bottom Layer w10: PK1.5@80,475.47 cw(c80,416.26) 121.87,458.13 cw(c163.74,500) PK1.5@104.53,500 ; PK1.5@80,485.47 cw(c80,450.4) 104.8,475.2 cw(c129.6,500) PK1.5@94.53,500 ; PK1.5@80,500 122,458 122,380 100,358 22,358 21,359 21,1980 60,2019 v1(109,2019) ; v1@94.86,2004.86 ccw(c60.72,1970.72) 60.72,2019 ccw(c60.72,2067.28) v1@94.86,2033.14
NetPK_1: PK.1 R5.1 U6.18 | length 4215.9
  Top Layer w10: U6.18@2427.32,236.89 ccw(c2444.73,236.89) 2432.42,224.58 ; U6.18@2431.5,263.46 2431.5,225.5 ; U6.18@2437.32,236.89 ccw(c2478.88,236.89) 2449.49,207.51 ; v1@2572.86,183.86 ccw(c2538.72,149.72) 2538.72,198 ccw(c2538.72,246.28) v1@2572.86,212.14 ; v1(2587,198) 2459,198 2431.5,225.5 ; v1(3036,115) 3046,115 3076,145 ; v1@3038.14,124.77 ccw(c3043.93,151.21) 3063.07,132.07 ccw(c3080.14,115) v1@3056,115 ; v1@3040.28,134.54 ccw(c3048.57,172.42) 3076,145 ; R5.1@3239.69,2021.85 cw(c3239.69,1960.38) 3283.15,2003.85 ; R5.1@3239.69,2031.85 cw(c3239.69,1994.52) 3266.08,2020.92 ; R5.1@3239.69,2033.43 3239.69,2027 3260,2027 ; R5.1@3253.48,2031.56 ccw(c3260,2033.93) 3260,2027 ; R5.1@3253.76,2022.35 cw(c3260,2020.49) 3260,2027 ; PK.1@3322.66,2162.66 cw(c3254.23,2094.23) 3351,2094.23 ; PK.1@3329.73,2169.73 cw(c3278.37,2118.37) 3351,2118.37 ; PK.1@3336.8,2176.8 cw(c3302.51,2142.51) 3351,2142.51 ; PK.1@3340,2155.47 cw(c3340,2096.26) 3381.87,2138.13 cw(c3423.74,2180) PK.1@3364.53,2180 ; PK.1@3340,2165.47 cw(c3340,2130.4) 3364.8,2155.2 cw(c3389.6,2180) PK.1@3354.53,2180 ; 3351,2147.34 cw(c3372.66,2147.34) PK.1@3357.34,2162.66 ; 2431.5,225.5 ccw(c2423.29,225.5) 2428.09,232.16 cw(c2423.29,225.5) 2431.5,225.5 ; 2431.5,225.5 cw(c2439.7,225.5) 2434.9,232.16 ccw(c2439.7,225.5) 2431.5,225.5 ; 3076,145 3089,158 3355,158 3472.44,275.44 3472.44,2047.56 PK.1@3351,2169 ; 3260,2027 3292.15,1994.85 3310.73,1994.85 3351,1994.85 PK.1@3351,2169 ; PK.1@3351,2169 PK.1@3340,2180 PK.1@3351,2169
  Bottom Layer w10: v1@2587,178 cw(c2587,129.72) 2621.14,163.86 cw(c2655.28,198) v1@2607,198 ; v1(2587,198) 2642,143 3008,143 v1(3036,115)
NetPK_4: PK.4 U6.17 | length 2951.3
  Top Layer w10: U6.17@2395.88,232.77 cw(c2385.93,222.82) 2400,222.82 cw(c2414.07,222.82) U6.17@2404.12,232.77 ; U6.17@2400,263.46 2400,216 2459,157 2676,157 2740,221 2740,300 2804,364 2804,517 2740,581 2740,807 2760,827 2760,2193 2789,2222 2998,2222 PK.4@3040,2180 ; PK.4@3015.47,2180 ccw(c2956.26,2180) 2998.13,2221.87 ccw(c3040,2263.74) PK.4@3040,2204.53 ; PK.4@3025.47,2180 ccw(c2990.4,2180) 3015.2,2204.8 ccw(c3040,2229.6) PK.4@3040,2194.53
NetPK_5: PK.5 U6.16 | length 2799.6
  Top Layer w10: U6.16@2364.38,232.77 cw(c2354.44,222.82) 2368.5,222.82 cw(c2382.57,222.82) U6.16@2372.62,232.77 ; U6.16@2368.5,263.46 2368.5,187.37 2415.88,140 2718,140 2758,180 2758,288 2821,351 2821,535 2758,598 2758,791 2777,810 2777,2017 PK.5@2940,2180 ; PK.5@2915.47,2180 cw(c2856.26,2180) 2898.13,2138.13 cw(c2940,2096.26) PK.5@2940,2155.47 ; PK.5@2925.47,2180 cw(c2890.4,2180) 2915.2,2155.2 cw(c2940,2130.4) PK.5@2940,2165.47
NetR3_1: R3.1 R4.2 U6.19 | length 2373.5
  Top Layer w10: R3.1@819.69,73.43 819.69,44.31 ; R4.2@1208.71,55.52 cw(c1189.73,34) 1218.43,34 ; R4.2@1214.42,83.81 cw(c1239.02,62.36) 1239.02,95 ; R4.2@1221.96,77.24 cw(c1261.01,43.19) v1@1261.01,95 ; R4.2@1228.14,55.52 ccw(c1247.12,34) 1218.43,34 ; R4.2@1229.49,70.67 cw(c1283,24.02) v1(1283,95) 1218.43,95 R4.2@1218.43,73.43 1218.43,34 ; v1@1268.86,80.86 ccw(c1234.72,46.72) 1234.72,95 ccw(c1234.72,143.28) v1@1268.86,109.14 ; v1(2258,338) 2283,313 2462.99,313 U6.19@2462.99,263.46 ; U6.19@2458.87,294.16 ccw(c2448.93,304.11) 2462.99,304.11 ccw(c2477.06,304.11) U6.19@2467.11,294.16 ; 819.69,44.31 ccw(c810.22,44.31) 813.93,53.03 cw(c810.22,44.31) 819.69,44.31 ; 819.69,44.31 cw(c829.16,44.31) 825.44,53.03 ccw(c829.16,44.31) 819.69,44.31 ; 819.69,44.31 830,34 1218.43,34
  Bottom Layer w10: v1(1283,95) 1715.38,95 1958.38,338 v1(2258,338) ; v1@1297.14,80.86 cw(c1331.28,46.72) 1331.28,95 cw(c1331.28,143.28) v1@1297.14,109.14 ; v1@2243.86,323.86 ccw(c2209.72,289.72) 2209.72,338 ccw(c2209.72,386.28) v1@2243.86,352.14
NetR6_1: R6.1 S1.2 U6.32 | length 4100.3
  Top Layer w10: 1560.5,854.13 cw(c1499.84,793.46) R6.1@1585.63,793.46 ; 1577.57,837.06 cw(c1533.98,793.46) R6.1@1595.63,793.46 ; 1594.65,819.98 cw(c1568.13,793.46) R6.1@1605.63,793.46 ; R6.1@1595.37,807.29 ccw(c1592.86,814.31) 1600.32,814.31 ; R6.1@1600.32,786.57 1600.32,814.31 ; R6.1@1605.26,807.29 cw(c1607.77,814.31) 1600.32,814.31 ; v1@1611.86,1358.86 ccw(c1577.72,1324.72) 1577.72,1373 ccw(c1577.72,1421.28) v1@1611.86,1387.14 ; v1(1626,1373) 1571,1373 1540,1342 1540,874.63 1600.32,814.31 ; U6.32@2616.54,605.98 2660,605.98 2670,615.98 2670,897 2740,967 2740,1242 2681,1301 2681,1361 2709,1389 v1(2709,1410) ; U6.32@2647.23,601.86 cw(c2657.18,591.92) 2657.18,605.98 cw(c2657.18,620.05) U6.32@2647.23,610.1 ; 2691.5,1371.5 ccw(c2677.41,1385.59) v1@2693.18,1397.77 ; 2699.54,1379.54 ccw(c2686.48,1392.59) v1@2701.09,1403.88
  Bottom Layer w10: v1@1611.86,1387.14 ccw(c1577.72,1421.28) 1626,1421.28 ccw(c1674.28,1421.28) v1@1640.14,1387.14 ; v1(1626,1373) 1626,1430 1706,1510 2605,1510 2705,1410 v1(2709,1410) ; 2668.03,1446.97 ccw(c2709,1487.94) v1@2709,1430 ; 2677.69,1437.31 cw(c2650.37,1410) v1@2689,1410 ; 2685.1,1429.9 ccw(c2709,1453.8) v1@2709,1420 ; v1@2706,1412 S1.2@3200,1420 ; v1@2716.18,1403.04 cw(c2738.55,1381.39) 2738.05,1412.52 ; v1@2722.91,1424.37 ccw(c2751.63,1454.04) 2752.3,1412.75 ; v1@2723.37,1396.09 cw(c2763.08,1357.64) 2762.19,1412.91 ; S1.2@3177.43,1441.85 cw(c3122.93,1494.61) 3124.16,1418.77 cw(c3125.39,1342.93) S1.2@3178.15,1397.43 ; S1.2@3184.61,1434.9 cw(c3147.46,1470.86) 3148.3,1419.16 cw(c3149.14,1367.46) S1.2@3185.1,1404.61
NetU6_42: U6.42 USB.2 | length 1241.6
  Top Layer w10: USB.2@1764.02,165.32 1764.02,213.06 1721,256.08 1721,700 1751,730 2136,730 2168.94,762.94 2288.51,762.94 2305.51,745.94 U6.42@2305.51,696.54 ; U6.42@2301.39,727.23 ccw(c2291.45,737.18) 2305.51,737.18 ccw(c2319.58,737.18) U6.42@2309.63,727.23
NetU6_43: U6.43 USB.3 | length 1116.7
  Top Layer w10: USB.3@1789.61,165.32 1789.61,211.51 1738,263.12 1738,600 1760,622 1937,622 1993,678 2110,678 2153,721 2205.06,721 2230,745.94 2258.08,745.94 2274.02,730 U6.43@2274.02,696.54 ; 2259.2,744.82 cw(c2237.49,723.11) U6.43@2268.19,723.11
VCC: C2.2 PK1.2 R1.2 R6.2 U1.3 U2.12 U2.34 U4.12 U4.18 VCC.1 VCC.2 | length 7450.2
  Top Layer w15: PK1.2@80,188 PK1.2@80,200 ; U2.34@280,1690.79 570.21,1690.79 670.21,1590.79 911,1590.79 U2.12@980,1590.79 ; U2.34@298.84,1681.95 cw(c320.18,1660.61) 320.18,1690.79 cw(c320.18,1720.97) U2.34@298.84,1699.63 ; 721,1590.79 732,1579.79 ; v1@722.63,987.37 ccw(c692.75,1017.25) 735,1017.25 ccw(c777.25,1017.25) v1@747.37,987.37 ; v1(735,975) 735,1590.79 ; 735,1576 748.89,1589.89 ; U1.3@930.55,583.86 U1.3@946.69,600 ; U2.12@961.16,1581.95 ccw(c939.82,1560.61) 939.82,1590.79 ccw(c939.82,1620.97) U2.12@961.16,1599.63 ; U4.18@1486.9,1166.43 cw(c1476.18,1155.71) 1491.34,1155.71 cw(c1506.5,1155.71) U4.18@1495.78,1166.43 ; U4.18@1491.34,1170.87 1491.34,993.24 1520.5,964.07 1520.5,787.65 R6.2@1521.57,786.57 ; R6.2@1512.96,802.08 ccw(c1494.75,820.29) 1520.5,820.29 ; 1520.5,825.47 ccw(c1553.58,825.47) R6.2@1530.19,802.08 ; v1(2132,1228) 2261.61,1228 2349.61,1140 U4.12@2349.61,1100 ; v1@2144.37,1215.63 cw(c2174.25,1185.75) 2174.25,1228 cw(c2174.25,1270.25) v1@2144.37,1240.37 ; U4.12@2340.99,1118.93 ccw(c2320.19,1139.73) 2349.61,1139.73 ccw(c2379.02,1139.73) U4.12@2358.22,1118.93
  Top Layer w25: PK1.2@80,188 120,148 521.46,148 533.46,160 C2.2@533.46,200 565.46,232 758,232 827,232 838,243 838,300.57 898.43,361 R1.2@898.43,393.43 898.43,472 930.55,504.13 U1.3@930.55,583.86 ; PK1.2@96.99,198.94 ccw(c155.32,195.32) 114,154 ; C2.2@542.62,200 cw(c564.72,200) C2.2@549.09,215.63 ; 868.1,330.68 ccw(c812.24,386.54) R1.2@891.24,386.54 ; U1.3@934.24,607.23 ccw(c951.7,624.69) 951.7,600 ; U1.3@946.69,600 VCC.1@1080,600 VCC.2@1180,600 ; VCC.1@1067.96,587.96 ccw(c1038.89,558.89) 1038.89,600 ccw(c1038.89,641.11) VCC.1@1067.96,612.04 ; VCC.1@1092.04,587.96 cw(c1121.11,558.89) 1121.11,600 cw(c1121.11,641.11) VCC.1@1092.04,612.04 ; VCC.2@1167.96,587.96 ccw(c1138.89,558.89) 1138.89,600 ccw(c1138.89,641.11) VCC.2@1167.96,612.04
  Bottom Layer w15: 812.5,897.5 812,898 814.03,895.97 1360.97,895.97 1429,964 1429,1109.87 1490,1170.87 U4.18@1491.34,1170.87 1548.47,1228 1645.14,1228 1645.64,1227.5 2131.5,1227.5 v1(2132,1228) ; 1461.4,1142.27 ccw(c1432.8,1170.87) U4.18@1473.25,1170.87 ; U4.18@1509.43,1170.87 cw(c1553.1,1170.87) 1522.22,1201.75 ; 2088.54,1227.5 ccw(c2088.54,1271.46) v1@2119.63,1240.37 ; 2090.96,1227.5 cw(c2090.96,1186.96) v1@2119.63,1215.63
  Bottom Layer w25: PK1.2@80,200 130,200 298,368 298,841 355,898 812,898 v1(735,975) ; PK1.2@92.04,187.96 cw(c121.11,158.89) 121.11,200 cw(c121.11,241.11) PK1.2@92.04,212.04 ; v1@735,962.5 cw(c735,932.32) 756.34,953.66 cw(c777.68,975) v1@747.5,975
pads on no net: J1.4 J1.5 PK1.6 PK.6 U2.15 U2.16 U2.17 U2.18 U2.19 U2.25 U2.29 U2.42 U3.2@3016.73,252.48 U3.2@3027.56,252.48 U6.12 U6.13 U6.33 U6.34 USB.0 USB.4

## Polygon pours and split planes (outlines as drawn)
no net on Top Layer "Top Layer-No Net" (solid, pour order 1000): 0,2300 1283,2300 1283,515 1281,513 0,513 0,2300
no net on Bottom Layer "Top Layer-No Net" (solid, pour order 1001): 0,2300 1283,2300 1283,515 1281,513 0,513 0,2300

## Keep-outs
Keep-Out Layer:
  lines w1.97: 3500,0 0,0 0,2300 3500,2300

## Silkscreen, mask and mechanical layers (free items; w line width, h text height)
Top Overlay:
  lines w10: 1634.94,2177.93 ccw(c1681.1,2149.61) 1701.16,2099.3 ; 1645.23,2164.46 ccw(c1679.13,2150.59) 1694.05,2117.14 ; 1664.18,2152.73 ccw(c1679.67,2148.19) 1686.69,2133.65 ; 2362.81,2268.81 cw(c2382.87,2218.5) 2429.04,2190.18 ; 2369.93,2250.97 cw(c2384.84,2217.52) 2418.74,2203.65 ; 2377.29,2234.46 cw(c2384.31,2219.92) 2399.8,2215.38
  text "LOPICA BOARD" at 1686.02,2156.5 h60
Bottom Overlay:
  drawing of 10352 lines, arcs and shapes, not listed
  text "DESIGN BY ESE 01" at 3295,1902 h60